# EAGLE board fuel2 (EAGLE 5.06)

Size 17.78 x 35.56 mm. Coordinates in mm from the lower left corner, seen from the top.
Outline: 0,35.56 17.78,35.56 17.78,0 0,0 0,35.56
Copper layers (1*16): Top 0.035mm / dielectric 1.5mm / Bottom 0.035mm
Design rules "SparkFun *": minimum track width 8mil, minimum drill 20mil, track to track 12mil, track to pad 12mil, pad to pad 8mil, via to via 10mil, smd to smd 8mil, copper to edge 10mil, drill to drill 8mil, minimum pad ring 12mil, minimum via ring 10mil, stop-mask expansion 4mil, vias tented up to drill 25mil, thermal gap 10mil

## Footprints (pad centres in the part's own frame; a part is rotated, then mirrored left to right if it is on the bottom)
0603 = smd 1.1 x 1: 1 -0.85,0; 2 0.85,0
SOD-123_MINI-SMA = smd 1.5 x 2.1: A 1.8,0; C -1.8,0
S4B-ZR-SM4A-TF = smd 0.7 x 2: P$1 -2.25,-2.3; P$2 -0.75,-2.3; P$3 0.75,-2.3; P$4 2.25,-2.3 | smd 1.1 x 1.9: P$5 -4.2,1.05; P$6 4.2,1.05
0805 = smd 0.8 x 1.2: 1 -0.9,0; 2 0.9,0
TSOP-8 = smd 0.733 x 0.28: P$1 -2.841,0.975; P$2 -2.841,0.325; P$3 -2.841,-0.325; P$4 -2.841,-0.975; P$5 2.841,-0.975; P$6 2.841,-0.325; P$7 2.841,0.325; P$8 2.841,0.975
2412 = smd 2.25 x 1.9: P$1 -2.625,1.45; P$2 -2.625,-1.45; P$3 2.625,1.45; P$4 2.625,-1.45

## Placement (x,y rotation side)
C1  .1u  [0603]  4.22,19.13 180 top
D1_5.1V  CGRM4001-G  [SOD-123_MINI-SMA]  5.55,15.03 90 top
D2_5.1V  CGRM4001-G  [SOD-123_MINI-SMA]  12.7,10.16 180 top
D3_5.1V  CGRM4001-G  [SOD-123_MINI-SMA]  12.7,19.05 180 top
J1  S4B-ZR-SM4A-TF  [S4B-ZR-SM4A-TF]  8.53,32.98 0 top
J2  S4B-ZR-SM4A-TF  [S4B-ZR-SM4A-TF]  8.53,2.83 180 top
R1  1K  [0603]  3.55,11.46 180 top
R2  499  [0805]  2.61,15.08 270 top
R4  150  [0805]  13.66,23.34 270 top
R5  150  [0805]  14.59,6.09 90 top
U$4  DS2782E+  [TSOP-8]  11.29,14.2 0 top
U$5  LVK24RXXXXXX  [2412]  6.93,25.92 180 top

## Library data of the parts
C1 R1 R2 R4 R5 = SparkFun
D1_5.1V D2_5.1V D3_5.1V = diode
J1 J2 = con-jst-cubic
U$4 = maxim-cubic
U$5 = current-cubic

## Nets
GND: C1.1 D1_5.1V.A J1.P$2 J2.P$3 U$4.P$2 U$5.P$4
I2C-SCL: J1.P$1 J2.P$4 R4.1
I2C-SDA: J1.P$4 J2.P$1 R5.1
N$1: D2_5.1V.C R5.2 U$4.P$5
N$2: D3_5.1V.C R4.2 U$4.P$6
N$3: D2_5.1V.A D3_5.1V.A U$4.P$7 U$5.P$2
N$4: C1.2 D1_5.1V.C R2.1 U$4.P$4
N$5: R1.1 U$4.P$3
VCC: J1.P$3 J2.P$2 R1.2 R2.2

## Tracks (layer width: path | path; a pad name or v marks a point on that pad's centre or on a via)
GND  (5 unrouted)
I2C-SCL  (2 unrouted)
I2C-SDA  (2 unrouted)
N$1  (2 unrouted)
N$2  (2 unrouted)
N$3  (3 unrouted)
N$4  (3 unrouted)
N$5  (1 unrouted)
VCC  (3 unrouted)